# Altium PCB GLCD.PcbDoc
Units mm, origin at the board's own origin, x right, y up, seen from the top; angles counter-clockwise.
Board outline 75.44 x 62.41 mm, 2 copper layers (Top Layer, Bottom Layer); 4 components, 19 nets, 63 pads, 36 vias.
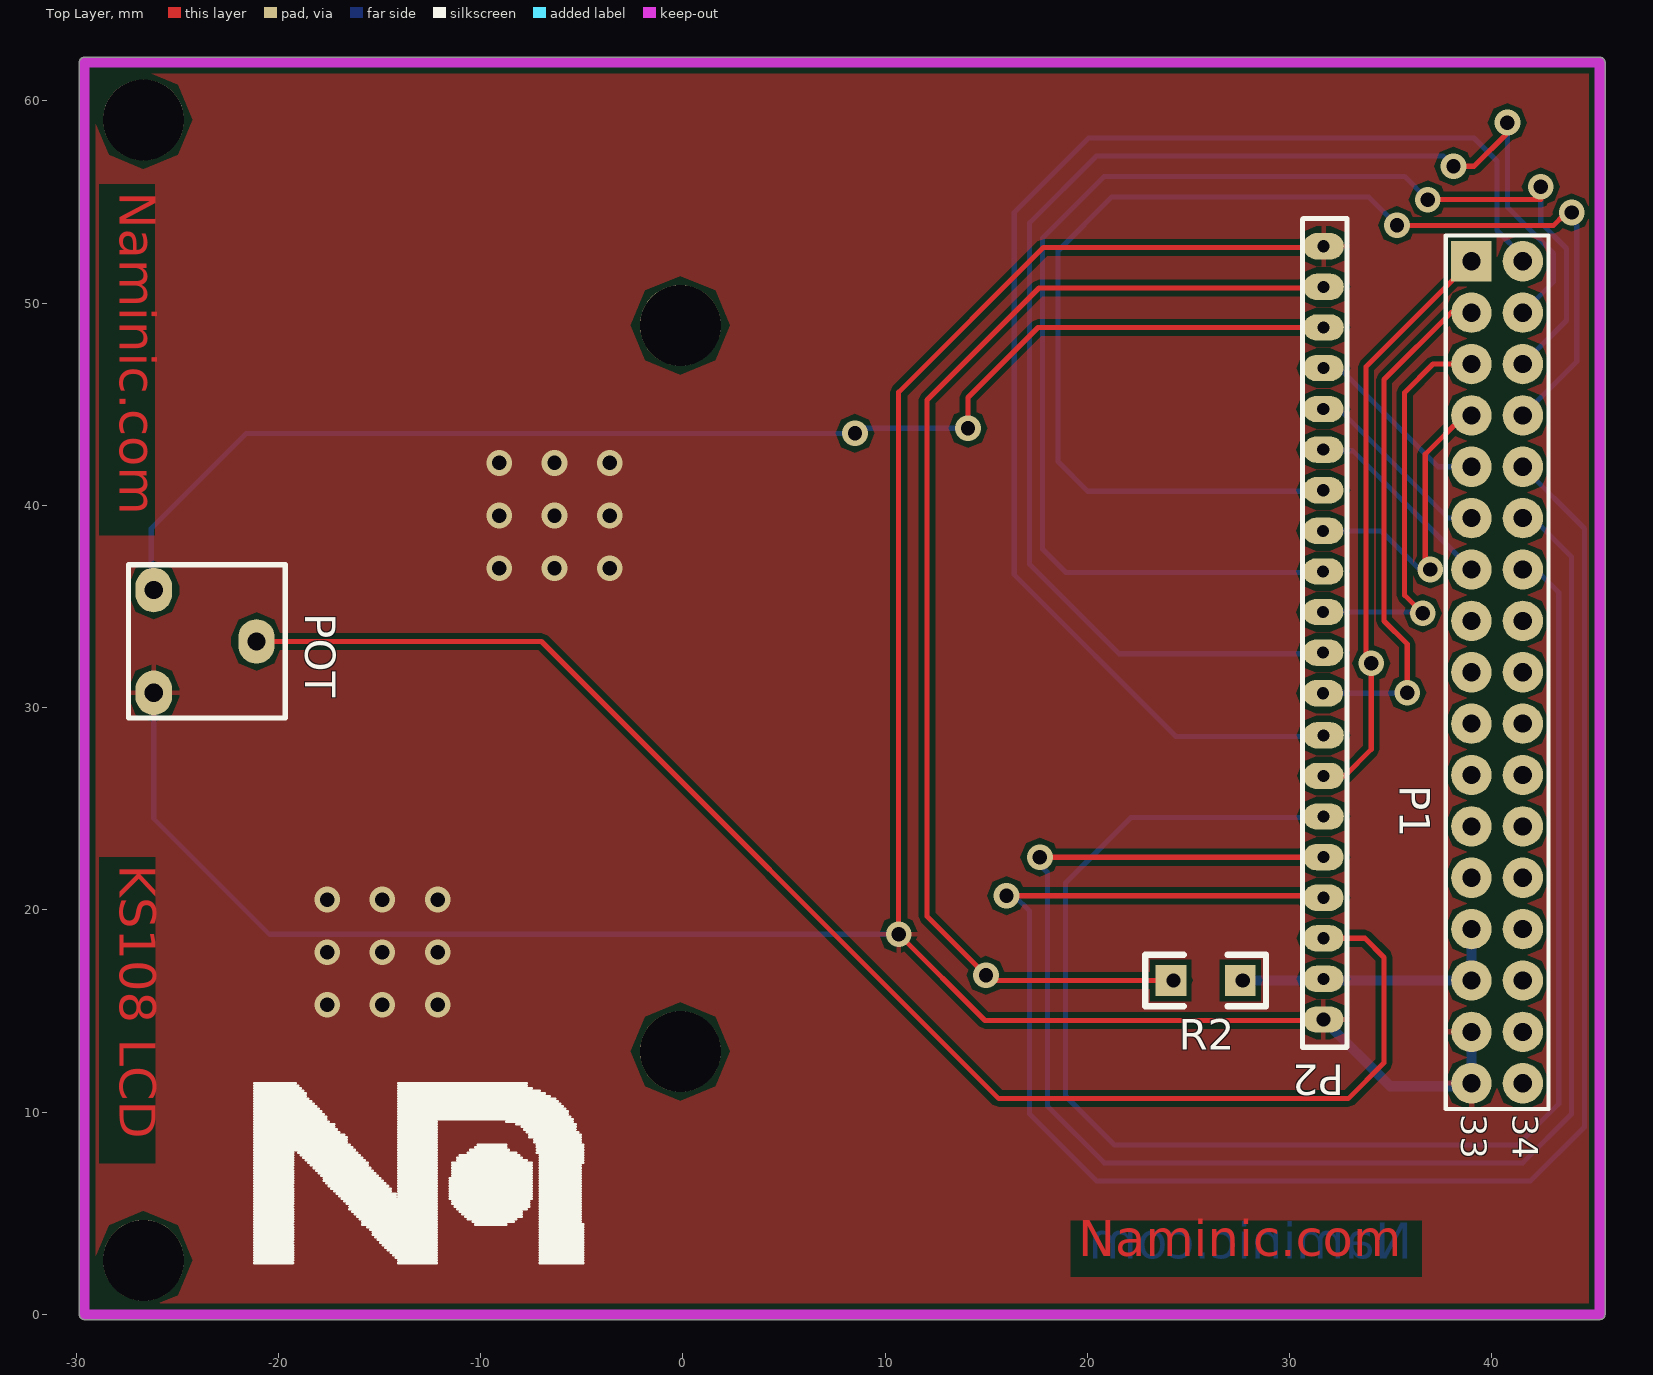
[diagram p0: Top Layer view]
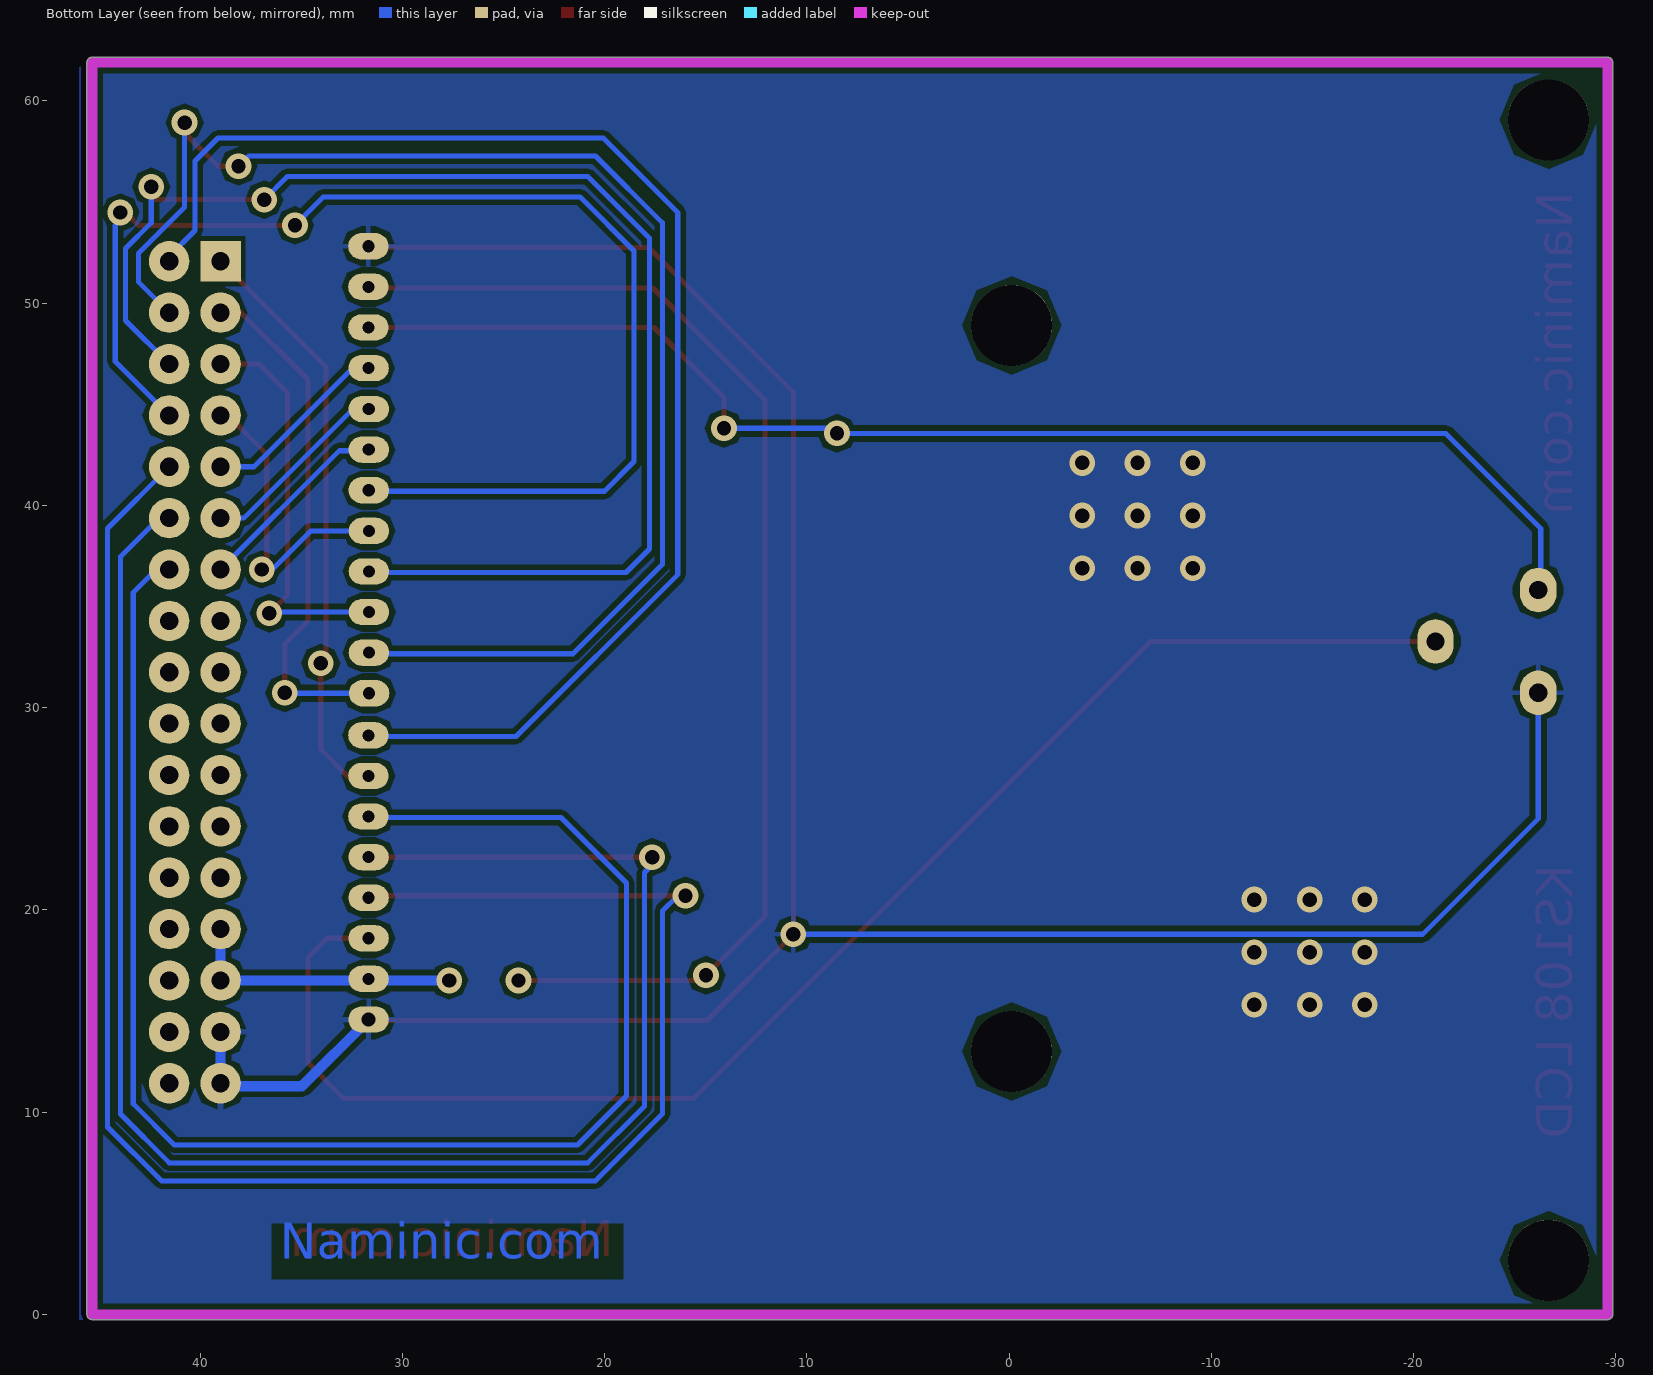
[diagram p1: Bottom Layer view, seen from below]

## Layer stack, top to bottom
Top Layer: signal copper 0.0356
Dielectric: dielectric 0.32, FR-4, Dk 4.8
Bottom Layer: signal copper 0.0356

## Board outline
-29.845,0 ccw(c-29.591,0) -29.591,-0.254 45.339,-0.254 ccw(c45.339,0) 45.593,0 45.593,61.903 ccw(c45.339,61.903) 45.339,62.157 -29.591,62.157 ccw(c-29.591,61.903) -29.845,61.903

## Design rules (kind name [scope] priority, off if disabled: settings)
Clearance [All] p1: gap=0.254
PolygonConnect [All] p1: connectstyle=Relief reliefconductorwidth=0.254 reliefentries=4 polygonreliefangle="90 Angle"
RoutingVias [All] p1: holewidth=0.711 width=1.27 viastyle="Through Hole" minholewidth=0.711 minwidth=1.27 maxholewidth=0.711 maxwidth=1.27
SilkscreenOverComponentPads SilkToSolderMaskClearance [IsPad] p1: minsilkscreentomaskgap=0.254
SolderMaskExpansion [All] p1: expansion=0.102
Width [All] p1: maxlimit=0.254 minlimit=0.254 preferedwidth=0.254
27 further rules are at their usual default settings.

## Components (designator, comment, footprint, x,y, rotation, side; value= is the part's Value field where it differs from the comment)
P1 "Header 17X2" HDR2X17 38.989,52.07 r270 top
P2 "Header 20" small_header -333.253,426.012 r180 top
POT "RPot SM" pot -26.162,35.814 r270 top
R2 "Res3" 1206 24.13,16.51 r0 top

## Footprints (in the part's own frame and the unit in brackets; to place one, negate y for a bottom-side part, rotate by r counter-clockwise, add the part's x,y. Pads: shape width x height; smd on the part's side, far side on the other; paste and mask are expansions set on the pad)
1206 [mil]
  rect 60x60 smd: 1(0,0) 2(135,0)
  silkscreen extent -50,-50 185,50, body extent -14,-35 151,36, height 25
HDR2X17 [mm] "Connector; Header; 17x2 Position"
  rect 2x2 hole 0.9: 1(0,0)
  round 2 hole 0.9: 2(0,2.54) 3(2.54,0) 4(2.54,2.54) 5(5.08,0) 6(5.08,2.54) 7(7.62,0) 8(7.62,2.54) 9(10.16,0) 10(10.16,2.54) 11(12.7,0) 12(12.7,2.54) 13(15.24,0) 14(15.24,2.54) 15(17.78,0) 16(17.78,2.54) 17(20.32,0) 18(20.32,2.54) 19(22.86,0) 20(22.86,2.54) 21(25.4,0) 22(25.4,2.54) 23(27.94,0) 24(27.94,2.54) 25(30.48,0) 26(30.48,2.54) 27(33.02,0) 28(33.02,2.54) 29(35.56,0) 30(35.56,2.54) 31(38.1,0) 32(38.1,2.54) 33(40.64,0) 34(40.64,2.54)
  silkscreen extent -1.27,-1.27 41.91,3.81
pot [mm]
  oval 2.2x1.8 hole 0.9: 1(0,0) 2(5.08,0) 3(2.54,5.08)
  silkscreen extent -1.25,-1.25 6.33,6.5
small_header [mm]
  oval 2x1.3 hole 0.7: 1(-364.922,411.429)
  oval 2x1.3 hole 0.6: 2(-364.922,409.423) 3(-364.922,407.416) 4(-364.922,405.409) 5(-364.922,403.403) 6(-364.93,401.393) 7(-364.93,399.387) 8(-364.93,397.38) 9(-364.896,395.3) 10(-364.905,393.291) 11(-364.905,391.284) 12(-364.905,389.277) 13(-364.905,387.271) 14(-364.913,385.261) 15(-364.913,383.255) 16(-364.913,381.248) 17(-364.922,379.222) 18(-364.93,377.212) 19(-364.93,375.206) 20(-364.93,373.199)
  silkscreen extent -366.09,371.83 -363.88,412.8

## Part data
P1: "Header, 17-Pin, Dual row"
P2: "Header, 20-Pin"
POT: "Square Trimming Potentiometer"
R2: "Resistor"

## Free pads (board coordinates)
  round 4 hole 4: 3(-26.67,2.675) 3(-26.67,59.063) 3(-0.127,13) 3(-0.127,48.903)

## Via types
v1: diameter 1.27, hole 0.711, Top Layer to Bottom Layer, 36 vias

## Nets (pads, with @x,y where several pads share a name; then routed paths per layer and width w, separated by ;. In a path a pad name is that pad's centre, name@x,y a point inside that pad or via, vN(x,y) a via of type N, cw(c..) or ccw(c..) an arc to the next point about the centre after c; other vN are vias at no path point)
GND: P1.31 P1.33 P2.1 P2.20 POT.2 | length 130.6
  Top Layer w0.254: P2.1@31.669,14.529 14.935,14.529 v1(10.668,18.796) 10.668,45.593 17.834,52.759 31.623,52.759 P2.20
  Bottom Layer w0.254: POT.2@-25.4,30.734 -26.162,29.972 -26.162,24.511 -20.447,18.796 v1(10.668,18.796) ; P1.33@38.837,11.278 P1.33
  Bottom Layer w0.508: P2.1 34.974,11.278 P1.33@38.837,11.278 ; P1.33 P1.31
  other v1: -17.59,15.303 -14.859,15.303 -12.128,15.303 -17.59,17.907 -14.859,17.907 -12.128,17.907 -17.59,20.511 -14.859,20.511 -12.128,20.511 -9.08,36.893 -6.35,36.893 -3.619,36.893 -9.08,39.497 -6.35,39.497 -3.619,39.497 -9.08,42.1 -6.35,42.1 -3.619,42.1
NetP2_19: P2.19 R2.1 | length 61
  Top Layer w0.254: v1(24.257,16.51) 15.24,16.51 v1(14.986,16.764) 12.065,19.685 12.065,45.212 17.605,50.752 31.623,50.752 P2.19
PE0: P1.1 P2.7 | length 29.3
  Top Layer w0.254: P2.7 32.721,26.625 34.036,27.94 v1(34.036,32.194) 34.036,32.385 33.782,32.639 33.782,36.195 33.782,43.307 33.782,46.863 P1.1
PE1: P1.2 P2.8 | length 67.9
  Bottom Layer w0.254: P2.8 31.623,28.578 24.381,28.578 16.383,36.576 16.383,54.483 20.066,58.166 39.116,58.166 40.259,57.023 40.259,53.594 41.529,52.324 P1.2
PE2: P1.3 P2.9 | length 25.8
  Top Layer w0.254: v1(35.814,30.734) 35.814,33.147 34.671,34.29 34.671,46.223 37.978,49.53 P1.3
  Bottom Layer w0.254: P2.9 35.792,30.712 v1(35.814,30.734)
PE3: P1.4 P2.10 | length 70.6
  Top Layer w0.254: v1(38.1,56.769) 39.116,56.769 40.767,58.42 v1(40.767,58.928)
  Bottom Layer w0.254: P2.10@31.652,32.667 21.562,32.667 17.145,37.084 17.145,53.975 20.447,57.277 37.592,57.277 v1(38.1,56.769) ; v1(40.767,58.928) 40.767,54.737 43.053,52.451 43.053,51.054 P1.4
PE4: P1.5 P2.11 | length 20.6
  Top Layer w0.254: v1@36.063,34.671 v1(36.576,34.671) 35.687,35.56 35.687,45.588 37.089,46.99 P1.5
  Bottom Layer w0.254: P2.11 36.519,34.728 v1(36.576,34.671)
PE5: P1.6 P2.12 | length 66.9
  Top Layer w0.254: v1(36.83,55.118) 42.418,55.118 v1(42.418,55.753)
  Bottom Layer w0.254: P2.12@31.652,36.681 18.945,36.681 17.78,37.846 17.78,53.213 20.828,56.261 35.687,56.261 v1(36.83,55.118) ; P1.6 43.688,49.149 43.688,52.705 42.418,53.975 v1(42.418,55.753)
PE6: P1.7 P2.13 | length 15
  Top Layer w0.254: v1(36.957,36.83) 36.703,37.084 36.703,42.531 38.622,44.45 P1.7
  Bottom Layer w0.254: P2.13 34.524,38.741 36.435,36.83 v1(36.957,36.83)
PE7: P1.8 P2.14 | length 63.2
  Top Layer w0.254: v1(35.306,53.848) 43.053,53.848 43.561,54.356 43.688,54.356 43.942,54.102 v1(43.942,54.483)
  Bottom Layer w0.254: P2.14@31.66,40.697 20.009,40.697 18.542,42.164 18.542,52.578 21.209,55.245 33.909,55.245 v1(35.306,53.848) ; P1.8 44.196,47.117 44.196,53.848 43.942,54.102 v1(43.942,54.483)
PE8: P1.9 P2.17 | length 9.6
  Bottom Layer w0.254: P2.17@31.369,46.736 32.512,46.736 37.338,41.91 P1.9
PE9: P1.10 P2.4 | length 91
  Top Layer w0.254: v1(16.002,20.701) P2.4@31.669,20.701
  Bottom Layer w0.254: v1(16.002,20.701) 16.383,20.701 17.145,19.939 17.145,9.906 20.447,6.604 41.91,6.604 44.577,9.271 44.577,38.862 P1.10
PE10: P1.11 P2.16 | length 8.9
  Bottom Layer w0.254: P2.16@32.252,44.71 32.506,44.71 37.846,39.37 P1.11
PE11: P1.12 P2.5 | length 84.9
  Top Layer w0.254: v1(17.653,22.606) P2.5@31.669,22.606
  Bottom Layer w0.254: v1@17.653,22.225 18.034,21.844 18.034,10.287 20.828,7.493 41.529,7.493 43.942,9.906 43.942,37.465 42.037,39.37 P1.12
PE12: P1.13 P2.15 | length 9.8
  Bottom Layer w0.254: P2.15@31.66,42.703 33.116,42.703 P1.13
PE13: P1.14 P2.6 | length 78.4
  Bottom Layer w0.254: P2.6 31.623,24.565 22.152,24.565 18.923,21.336 18.923,10.795 21.336,8.382 41.275,8.382 43.307,10.414 43.307,35.687 42.164,36.83 P1.14
VDD: P1.27 P1.29 P2.2 R2.2 | length 14.1
  Bottom Layer w0.254: v1@27.483,16.535 v1@27.508,16.51
  Bottom Layer w0.508: v1@27.508,16.51 P1.29 P1.27
  other v1: 27.686,16.51
VO: P2.3 POT.3 | length 73.7
  Top Layer w0.254: POT.3@-20.32,33.274 -6.985,33.274 15.621,10.668 32.893,10.668 34.671,12.446 34.671,17.653 33.728,18.596 P2.3
VOUT: P2.18 POT.1 | length 66.4
  Top Layer w0.254: v1(14.097,43.815) 14.097,45.339 17.557,48.799 P2.18
  Bottom Layer w0.254: POT.1@-25.4,35.814 -26.289,36.703 -26.289,38.862 -21.59,43.561 v1(8.509,43.561) 8.763,43.815 v1(14.097,43.815)
pads on no net: P1.15 P1.16 P1.17 P1.18 P1.19 P1.20 P1.21 P1.22 P1.23 P1.24 P1.25 P1.26 P1.28 P1.30 P1.32 P1.34

## Polygon pours and split planes (outlines as drawn)
GND on Bottom Layer "Top Layer-No Net" (solid, pour order 0): 45.653,61.903 45.974,61.648 45.974,-0.254 -29.651,-0.254 -29.972,0.001 -29.972,61.903 45.653,61.903
GND on Top Layer "Top Layer-No Net" (solid, pour order 2): 45.847,61.468 45.847,55.626 45.847,0 45.688,0.127 -29.591,0.127 -29.591,61.776 -29.432,61.903 -28.885,61.468 45.847,61.468

## Keep-outs
Keep-Out Layer:
  lines w0.508: -29.591,0 -29.591,24.901 -29.591,61.903 45.339,61.903 45.339,10.16 45.339,0.889 45.339,0 -29.591,0

## Other copper
Top Layer:
  text "Naminic.com" at -28.448,55.499 h3.05 r270
  text "KS108 LCD" at -28.448,22.225 h3.05 r270
  text "Naminic.com" at 19.558,2.286 h3.05
Bottom Layer:
  text "Naminic.com" at 36.068,2.159 h3.05

## Silkscreen, mask and mechanical layers (free items; w line width, h text height)
Top Overlay:
  drawing of 248 lines, arcs and shapes, not listed

## Text inside footprints (layer, text, board x,y; h text height)
P1: Top Overlay "33" at 38.481,9.906 h1.27 r270; Top Overlay "34" at 41.021,9.906 h1.27 r270